# EAGLE board MiniPanel_V2 (EAGLE 8.7.1)
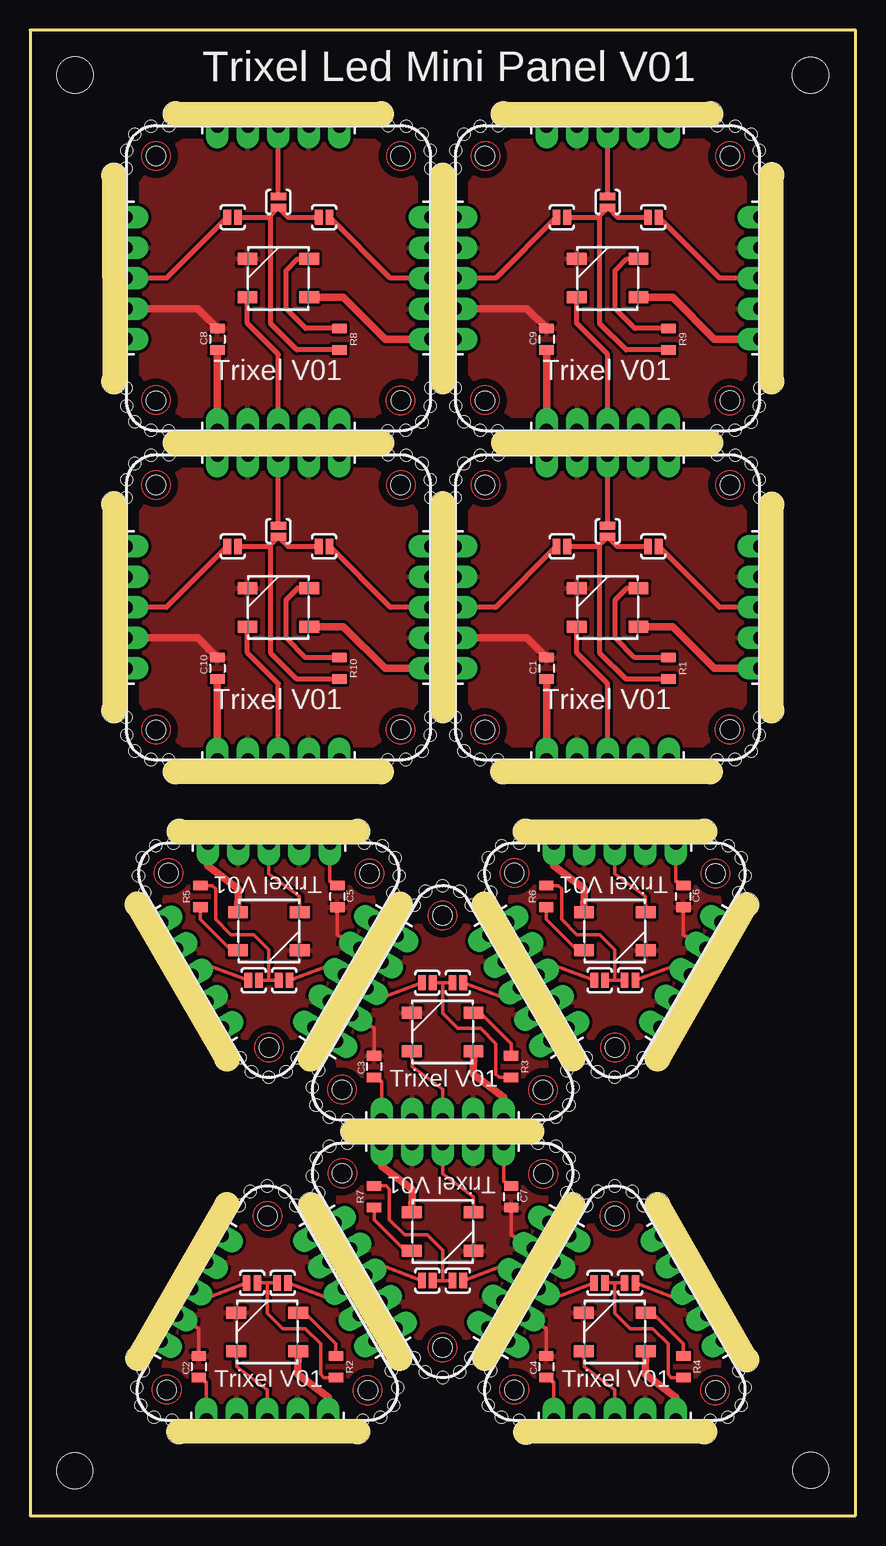
[diagram p0: board, top side]
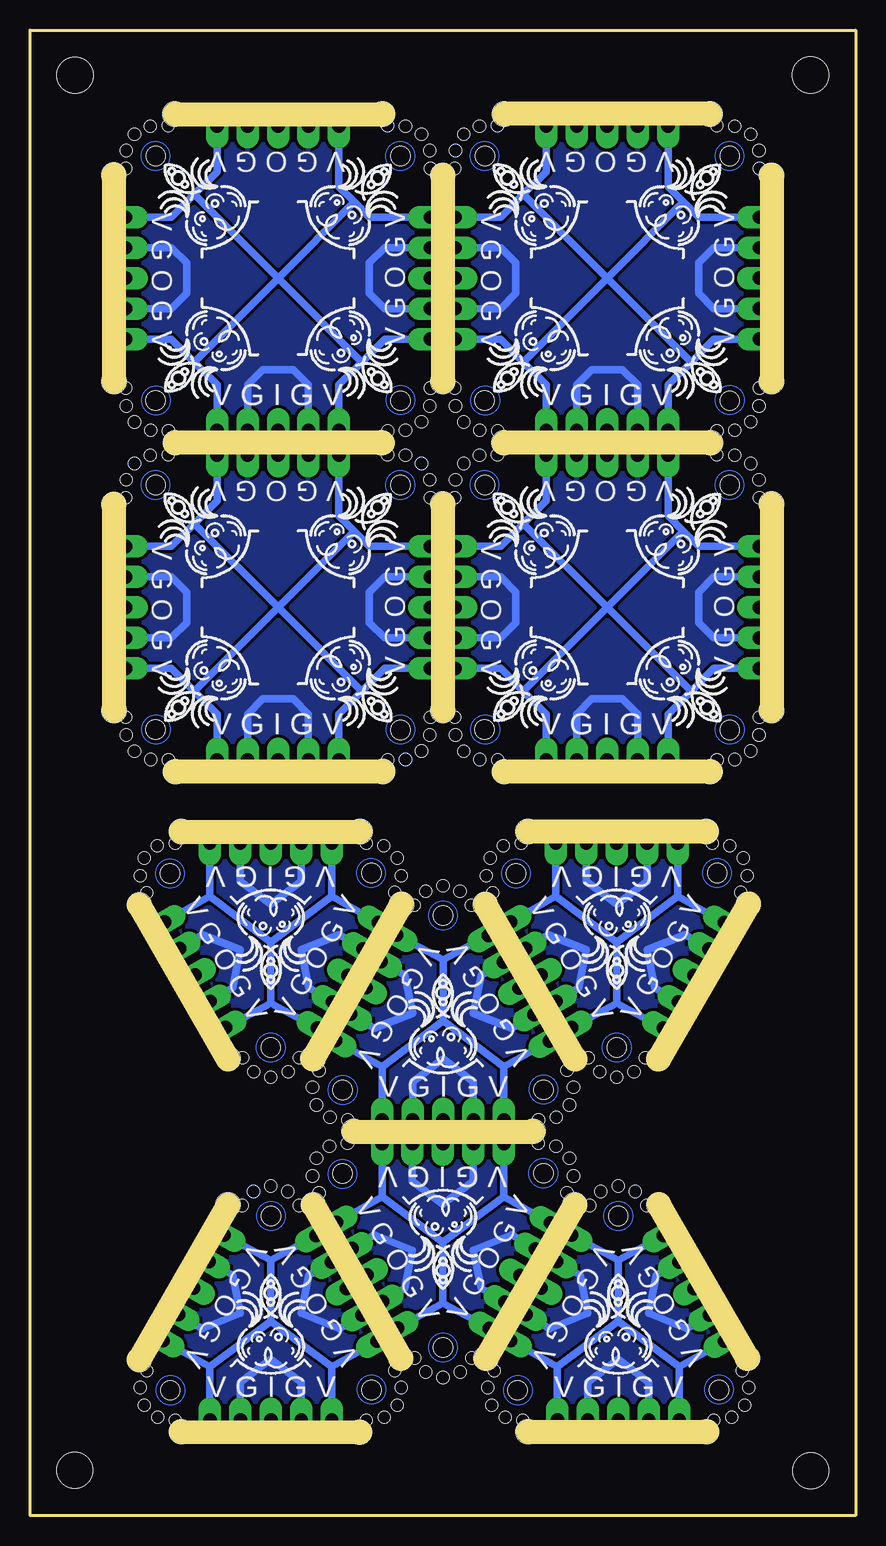
[diagram p1: board, bottom side, seen from below]

Size 68.8 x 123.8 mm. Coordinates in mm from the lower left corner, seen from the top.
Outline: 68.8,0 68.8,123.8 0,123.8 0,0 68.8,0
Copper layers (1*16): Top 0.035mm / dielectric 1.5mm / Bottom 0.035mm
Design rules "default": minimum track width 6mil, minimum drill 0.35mm, track to track 6mil, track to pad 6mil, pad to pad 6mil, via to via 6mil, smd to smd 6mil, copper to edge 40mil, drill to drill 6mil, minimum pad ring 10mil, minimum via ring 8mil, stop-mask expansion 4mil, vias tented up to drill 0mil, thermal gap 10mil
Holes 1.6 mm at 11.4,10.47 19.78,24.97 28.16,10.44 26,35.48 34.38,49.99 42.76,35.46 40.35,10.47 48.73,24.97 57.12,10.44 28.29,53.52 19.91,39.02 11.53,53.55 57.12,53.52 48.74,39.02 40.36,53.55 42.77,28.5 34.39,14 26,28.53 37.92,65.47 37.92,85.87 58.34,65.5 58.32,85.87 10.49,92.9 10.49,113.3 30.91,92.93 30.89,113.3 37.92,92.9 37.92,113.3 58.34,92.93 58.32,113.3 10.49,65.47 10.49,85.87 30.91,65.5 30.89,85.87
Holes 1 mm at 9.44,12.09 8.91,10.67 9.24,9.2 10.33,8.18 11.83,7.95 27.73,7.95 29.2,8.18 30.32,9.2 30.65,10.67 30.12,12.07 22.16,25.83 21.23,27 19.78,27.46 18.35,27 17.42,25.83 24.04,37.11 23.51,35.69 23.84,34.21 24.93,33.2 26.43,32.97 42.33,32.97 43.81,33.2 44.92,34.21 45.25,35.69 44.72,37.08 36.77,50.85 35.83,52.02 34.38,52.48 32.96,52.02 32.02,50.85 38.4,12.09 37.86,10.67 38.19,9.2 39.28,8.18 40.78,7.95 56.68,7.95 58.16,8.18 59.27,9.2 59.6,10.67 59.07,12.07 51.12,25.83 50.18,27 48.73,27.46 47.31,27 46.37,25.83 30.25,51.89 30.78,53.32 30.45,54.79 29.36,55.81 27.86,56.03 11.96,56.03 10.48,55.81 9.37,54.79 9.04,53.32 9.57,51.92 17.52,38.15 18.46,36.98 19.91,36.53 21.33,36.98 22.27,38.15 59.08,51.89 59.61,53.32 59.28,54.79 58.19,55.81 56.69,56.03 40.79,56.03 39.31,55.81 38.2,54.79 37.87,53.32 38.4,51.92 46.35,38.15 47.29,36.98 48.74,36.53 50.16,36.98 51.1,38.15 44.72,26.88 45.26,28.3 44.93,29.77 43.84,30.79 42.34,31.02 26.44,31.02 24.96,30.79 23.85,29.77 23.52,28.3 24.05,26.9 32,13.13 32.94,11.97 34.39,11.51 35.81,11.97 36.75,13.13 36.17,87.67 37.51,88.36 39.01,88.41 35.48,86.32 35.43,84.82 57.28,88.41 58.77,88.36 60.1,87.67 60.78,86.32 60.83,84.82 35.43,66.54 35.48,65.04 36.17,63.72 37.51,63.01 38.99,62.96 57.25,62.96 58.75,63.01 60.1,63.69 60.78,65.04 60.83,66.54 8.74,115.1 10.08,115.79 11.58,115.84 8.05,113.76 8,112.26 29.84,115.84 31.34,115.79 32.66,115.1 33.35,113.76 33.4,112.26 8,93.97 8.05,92.47 8.74,91.15 10.08,90.44 11.56,90.39 29.82,90.39 31.32,90.44 32.66,91.12 33.35,92.47 33.4,93.97 36.17,115.1 37.51,115.79 39.01,115.84 35.48,113.76 35.43,112.26 57.28,115.84 58.77,115.79 60.1,115.1 60.78,113.76 60.83,112.26 35.43,93.97 35.48,92.47 36.17,91.15 37.51,90.44 38.99,90.39 57.25,90.39 58.75,90.44 60.1,91.12 60.78,92.47 60.83,93.97 8.74,87.67 10.08,88.36 11.58,88.41 8.05,86.32 8,84.82 29.84,88.41 31.34,88.36 32.66,87.67 33.35,86.32 33.4,84.82 8,66.54 8.05,65.04 8.74,63.72 10.08,63.01 11.56,62.96 29.82,62.96 31.32,63.01 32.66,63.69 33.35,65.04 33.4,66.54
Holes 2 mm at 23.4,38.06 30.86,50.92 37.84,50.92 45.21,38.09 26.89,32.02 41.81,32.02 16.41,38.06 8.95,50.92 12.45,57.01 27.3,57.01 41.3,57 56.2,57 59.7,50.9 52.29,38.06 52.3,25.9 59.7,13 56.2,7 41.34,6.94 27.3,7 12.4,7 9,13.1 30.8,13.1 37.9,13.1 45.2,25.9 16.4,25.9 23.4,25.9 12.13,61.98 29.27,61.98 39.41,62 56.68,61.99 61.8,67.1 61.82,84.25 61.8,94.5 61.82,111.72 56.74,116.8 39.43,116.8 34.4,111.7 29.27,116.8 12.13,116.8 7,111.7 7,94.5 12.1,89.4 29.3,89.4 34.4,84.3 39.5,89.4 34.4,94.5 7,84.3 7,67.1 34.4,67.1 56.7,89.4
Holes 3 mm at 3.73,3.75 65.06,3.78 65.05,120.04 3.75,120.05
Milling: 25 lines

## Footprints (pad centres in the part's own frame; a part is rotated, then mirrored left to right if it is on the bottom)
0805 = smd 0.8 x 1.2: 1 -0.9,0; 2 0.9,0
WS2812B = smd 1.651 x 1: 1 -2.577,1.6; 2 -2.577,-1.6; 3 2.577,-1.6; 4 2.577,1.6
1X05_LONGPADS = drill 1.118 pad 1.88 long: 1 0,0; 2 2.54,0; 3 5.08,0; 4 7.62,0; 5 10.16,0
PAD-JUMPER-2-NO_YES_SILK = smd 0.635 x 1.27: 1 -0.45,0; 2 0.45,0

## Placement (x,y rotation side)
C1  0.1uF  [0805]  43.05,70.6 270 top
C2  0.1uF  [0805]  14.06,12.4 270 top
C3  0.1uF  [0805]  28.67,37.41 270 top
C4  0.1uF  [0805]  43.02,12.4 270 top
C5  0.1uF  [0805]  25.62,51.59 90 top
C6  0.1uF  [0805]  54.45,51.59 90 top
C7  0.1uF  [0805]  40.1,26.57 90 top
C8  0.1uF  [0805]  15.62,98.03 270 top
C9  0.1uF  [0805]  43.05,98.03 270 top
C10  0.1uF  [0805]  15.62,70.6 270 top
D1  [WS2812B]  48.13,75.68 180 top
D2  [WS2812B]  19.78,15.29 180 top
D3  [WS2812B]  34.38,40.31 180 top
D4  [WS2812B]  48.73,15.29 180 top
D5  [WS2812B]  19.91,48.69 0 top
D6  [WS2812B]  48.74,48.69 0 top
D7  [WS2812B]  34.39,23.68 0 top
D8  [WS2812B]  20.7,103.11 180 top
D9  [WS2812B]  48.13,103.11 180 top
D10  [WS2812B]  20.7,75.68 180 top
J1  [1X05_LONGPADS]  35.43,70.6 90 top
J2  [1X05_LONGPADS]  60.83,70.6 90 top
J3  [1X05_LONGPADS]  14.7,7.95 0 top
J4  [1X05_LONGPADS]  43.05,88.38 0 top
J5  [1X05_LONGPADS]  28.74,14.57 120 top
J6  [1X05_LONGPADS]  10.92,14.53 60 top
J7  [1X05_LONGPADS]  29.3,32.97 0 top
J8  [1X05_LONGPADS]  43.34,39.59 120 top
J9  [1X05_LONGPADS]  25.53,39.54 60 top
J10  [1X05_LONGPADS]  43.65,7.95 0 top
J11  [1X05_LONGPADS]  57.69,14.57 120 top
J12  [1X05_LONGPADS]  39.88,14.53 60 top
J13  [1X05_LONGPADS]  24.99,56.03 180 top
J14  [1X05_LONGPADS]  10.95,49.42 300 top
J15  [1X05_LONGPADS]  28.76,49.46 240 top
J16  [1X05_LONGPADS]  53.82,56.03 180 top
J17  [1X05_LONGPADS]  39.78,49.42 300 top
J18  [1X05_LONGPADS]  57.59,49.46 240 top
J19  [1X05_LONGPADS]  39.47,31.02 180 top
J20  [1X05_LONGPADS]  25.43,24.4 300 top
J21  [1X05_LONGPADS]  43.24,24.44 240 top
J22  [1X05_LONGPADS]  43.05,62.98 0 top
J23  [1X05_LONGPADS]  8,98.03 90 top
J24  [1X05_LONGPADS]  33.4,98.03 90 top
J25  [1X05_LONGPADS]  15.62,115.81 0 top
J26  [1X05_LONGPADS]  15.62,90.41 0 top
J27  [1X05_LONGPADS]  35.43,98.03 90 top
J28  [1X05_LONGPADS]  60.83,98.03 90 top
J29  [1X05_LONGPADS]  43.05,115.81 0 top
J30  [1X05_LONGPADS]  43.05,90.41 0 top
J31  [1X05_LONGPADS]  8,70.6 90 top
J32  [1X05_LONGPADS]  33.4,70.6 90 top
J33  [1X05_LONGPADS]  15.62,88.38 0 top
J34  [1X05_LONGPADS]  15.62,62.98 0 top
JP1  JUMPER-PAD-2-NOYES_SILK  [PAD-JUMPER-2-NO_YES_SILK]  51.94,80.76 0 top
JP2  JUMPER-PAD-2-NOYES_SILK  [PAD-JUMPER-2-NO_YES_SILK]  48.13,82.03 90 top
JP3  JUMPER-PAD-2-NOYES_SILK  [PAD-JUMPER-2-NO_YES_SILK]  18.51,19.38 180 top
JP4  JUMPER-PAD-2-NOYES_SILK  [PAD-JUMPER-2-NO_YES_SILK]  21.05,19.38 0 top
JP5  JUMPER-PAD-2-NOYES_SILK  [PAD-JUMPER-2-NO_YES_SILK]  33.11,44.4 180 top
JP6  JUMPER-PAD-2-NOYES_SILK  [PAD-JUMPER-2-NO_YES_SILK]  35.65,44.4 0 top
JP7  JUMPER-PAD-2-NOYES_SILK  [PAD-JUMPER-2-NO_YES_SILK]  47.46,19.38 180 top
JP8  JUMPER-PAD-2-NOYES_SILK  [PAD-JUMPER-2-NO_YES_SILK]  50,19.38 0 top
JP9  JUMPER-PAD-2-NOYES_SILK  [PAD-JUMPER-2-NO_YES_SILK]  21.18,44.6 0 top
JP10  JUMPER-PAD-2-NOYES_SILK  [PAD-JUMPER-2-NO_YES_SILK]  18.64,44.6 180 top
JP11  JUMPER-PAD-2-NOYES_SILK  [PAD-JUMPER-2-NO_YES_SILK]  50.01,44.6 0 top
JP12  JUMPER-PAD-2-NOYES_SILK  [PAD-JUMPER-2-NO_YES_SILK]  47.47,44.6 180 top
JP13  JUMPER-PAD-2-NOYES_SILK  [PAD-JUMPER-2-NO_YES_SILK]  35.66,19.59 0 top
JP14  JUMPER-PAD-2-NOYES_SILK  [PAD-JUMPER-2-NO_YES_SILK]  33.12,19.59 180 top
JP15  JUMPER-PAD-2-NOYES_SILK  [PAD-JUMPER-2-NO_YES_SILK]  44.32,80.76 180 top
JP16  JUMPER-PAD-2-NOYES_SILK  [PAD-JUMPER-2-NO_YES_SILK]  24.51,108.19 0 top
JP17  JUMPER-PAD-2-NOYES_SILK  [PAD-JUMPER-2-NO_YES_SILK]  20.7,109.46 90 top
JP18  JUMPER-PAD-2-NOYES_SILK  [PAD-JUMPER-2-NO_YES_SILK]  16.89,108.19 180 top
JP19  JUMPER-PAD-2-NOYES_SILK  [PAD-JUMPER-2-NO_YES_SILK]  51.94,108.19 0 top
JP20  JUMPER-PAD-2-NOYES_SILK  [PAD-JUMPER-2-NO_YES_SILK]  48.13,109.46 90 top
JP21  JUMPER-PAD-2-NOYES_SILK  [PAD-JUMPER-2-NO_YES_SILK]  44.32,108.19 180 top
JP22  JUMPER-PAD-2-NOYES_SILK  [PAD-JUMPER-2-NO_YES_SILK]  24.51,80.76 0 top
JP23  JUMPER-PAD-2-NOYES_SILK  [PAD-JUMPER-2-NO_YES_SILK]  20.7,82.03 90 top
JP24  JUMPER-PAD-2-NOYES_SILK  [PAD-JUMPER-2-NO_YES_SILK]  16.89,80.76 180 top
R1  [0805]  53.21,70.6 270 top
R2  1k  [0805]  25.49,12.4 270 top
R3  1k  [0805]  40.1,37.41 270 top
R4  1k  [0805]  54.45,12.4 270 top
R5  1k  [0805]  14.19,51.59 90 top
R6  1k  [0805]  43.02,51.59 90 top
R7  1k  [0805]  28.67,26.57 90 top
R8  [0805]  25.78,98.03 270 top
R9  [0805]  53.21,98.03 270 top
R10  [0805]  25.78,70.6 270 top

## Library data of the parts
C1-C10 = SparkFun-Capacitors
D1-D10 = SparkFun-LED; PROD_ID: DIO-12503
J1-J34 = SparkFun-Connectors
JP1-JP24 = SparkFun-Passives
R1-R10 = SparkFun-Resistors

## Nets
DIN: D1.4 J22.3
DIN1: D2.4 J3.3
DIN2: D3.4 J7.3
DIN3: D4.4 J10.3
DIN4: D5.4 J13.3
DIN5: D6.4 J16.3
DIN6: D7.4 J19.3
DIN7: D8.4 J26.3
DIN8: D9.4 J30.3
DIN9: D10.4 J34.3
DOUT: JP1.1 JP2.1 JP15.1 R1.2
DOUT1: JP3.1 JP4.1 R2.2
DOUT2: JP5.1 JP6.1 R3.2
DOUT3: JP7.1 JP8.1 R4.2
DOUT4: JP9.1 JP10.1 R5.2
DOUT5: JP11.1 JP12.1 R6.2
DOUT6: JP13.1 JP14.1 R7.2
DOUT7: JP16.1 JP17.1 JP18.1 R8.2
DOUT8: JP19.1 JP20.1 JP21.1 R9.2
DOUT9: JP22.1 JP23.1 JP24.1 R10.2
GND: C1.1 D1.3 J1.2 J1.4 J2.2 J2.4 J4.2 J4.4 J22.2 J22.4
GND1: C2.1 D2.3 J3.2 J3.4 J5.2 J5.4 J6.2 J6.4
GND2: C3.1 D3.3 J7.2 J7.4 J8.2 J8.4 J9.2 J9.4
GND3: C4.1 D4.3 J10.2 J10.4 J11.2 J11.4 J12.2 J12.4
GND4: C5.1 D5.3 J13.2 J13.4 J14.2 J14.4 J15.2 J15.4
GND5: C6.1 D6.3 J16.2 J16.4 J17.2 J17.4 J18.2 J18.4
GND6: C7.1 D7.3 J19.2 J19.4 J20.2 J20.4 J21.2 J21.4
GND7: C8.1 D8.3 J23.2 J23.4 J24.2 J24.4 J25.2 J25.4 J26.2 J26.4
GND8: C9.1 D9.3 J27.2 J27.4 J28.2 J28.4 J29.2 J29.4 J30.2 J30.4
GND9: C10.1 D10.3 J31.2 J31.4 J32.2 J32.4 J33.2 J33.4 J34.2 J34.4
N$1: J4.3 JP2.2
N$2: J2.3 JP1.2
N$3: J1.3 JP15.2
N$4: J5.3 JP4.2
N$5: D2.2 R2.1
N$6: J6.3 JP3.2
N$7: J8.3 JP6.2
N$8: D3.2 R3.1
N$9: J9.3 JP5.2
N$10: J11.3 JP8.2
N$11: D4.2 R4.1
N$12: J12.3 JP7.2
N$13: J14.3 JP10.2
N$14: D5.2 R5.1
N$15: J15.3 JP9.2
N$16: J17.3 JP12.2
N$17: D6.2 R6.1
N$18: J18.3 JP11.2
N$19: J20.3 JP14.2
N$20: D7.2 R7.1
N$21: J21.3 JP13.2
N$22: D1.2 R1.1
N$23: J25.3 JP17.2
N$24: J24.3 JP16.2
N$25: J23.3 JP18.2
N$26: D8.2 R8.1
N$27: J29.3 JP20.2
N$28: J28.3 JP19.2
N$29: J27.3 JP21.2
N$30: D9.2 R9.1
N$31: J33.3 JP23.2
N$32: J32.3 JP22.2
N$33: J31.3 JP24.2
N$34: D10.2 R10.1
VIN: C1.2 D1.1 J1.1 J1.5 J2.1 J2.5 J4.1 J4.5 J22.1 J22.5
VIN1: C2.2 D2.1 J3.1 J3.5 J5.1 J5.5 J6.1 J6.5
VIN2: C3.2 D3.1 J7.1 J7.5 J8.1 J8.5 J9.1 J9.5
VIN3: C4.2 D4.1 J10.1 J10.5 J11.1 J11.5 J12.1 J12.5
VIN4: C5.2 D5.1 J13.1 J13.5 J14.1 J14.5 J15.1 J15.5
VIN5: C6.2 D6.1 J16.1 J16.5 J17.1 J17.5 J18.1 J18.5
VIN6: C7.2 D7.1 J19.1 J19.5 J20.1 J20.5 J21.1 J21.5
VIN7: C8.2 D8.1 J23.1 J23.5 J24.1 J24.5 J25.1 J25.5 J26.1 J26.5
VIN8: C9.2 D9.1 J27.1 J27.5 J28.1 J28.5 J29.1 J29.5 J30.1 J30.5
VIN9: C10.2 D10.1 J31.1 J31.5 J32.1 J32.5 J33.1 J33.5 J34.1 J34.5

## Tracks (layer width: path | path; a pad name or v marks a point on that pad's centre or on a via)
DIN
  Top 0.406: J22.3 48.13,69.33 45.55,71.91 D1.4
DIN1
  Top 0.305: J3.3 19.78,10.49 17.24,12.4 D2.4
DIN2
  Top 0.305: J7.3 34.38,35.51 31.84,37.41 D3.4
DIN3
  Top 0.305: J10.3 48.73,10.49 46.19,12.4 D4.4
DIN4
  Top 0.305: J13.3 19.91,53.49 22.45,51.59 D5.4
DIN5
  Top 0.305: J16.3 48.74,53.49 51.28,51.59 D6.4
DIN6
  Top 0.305: J19.3 34.39,28.48 36.93,26.57 D7.4
DIN7
  Top 0.406: J26.3 20.7,96.76 18.12,99.34 D8.4
DIN8
  Top 0.406: J30.3 48.13,96.76 45.55,99.34 D9.4
DIN9
  Top 0.406: J34.3 20.7,69.33 18.12,71.91 D10.4
DOUT
  Top 0.406: JP2.1 47.31,80.76 JP15.1 | JP2.1 48.95,80.76 JP1.1 | R1.2 49.67,69.7 47.5,71.87 47.5,80.95 JP2.1
DOUT1
  Top 0.305: R2.2 24.49,11.5 24.22,11.76 24.22,14.3 22.95,15.57 21.05,15.57 19.78,16.84 19.78,19.38 | 19.78,19.38 JP4.1 | 19.78,19.38 JP3.1
DOUT2
  Top 0.305: R3.2 39.09,36.51 38.83,36.78 38.83,39.32 37.56,40.59 35.65,40.59 34.38,41.86 34.38,44.4 | 34.38,44.4 JP6.1 | 34.38,44.4 JP5.1
DOUT3
  Top 0.305: R4.2 53.44,11.5 53.18,11.76 53.18,14.3 51.91,15.57 50,15.57 48.73,16.84 48.73,19.38 | 48.73,19.38 JP8.1 | 48.73,19.38 JP7.1
DOUT4
  Top 0.305: R5.2 15.2,52.49 15.46,52.22 15.46,49.68 16.73,48.41 18.64,48.41 19.91,47.14 19.91,44.6 | 19.91,44.6 JP10.1 | 19.91,44.6 JP9.1
DOUT5
  Top 0.305: R6.2 44.03,52.49 44.29,52.22 44.29,49.68 45.56,48.41 47.47,48.41 48.74,47.14 48.74,44.6 | 48.74,44.6 JP12.1 | 48.74,44.6 JP11.1
DOUT6
  Top 0.305: R7.2 29.68,27.47 29.94,27.21 29.94,24.67 31.21,23.4 33.12,23.4 34.39,22.13 34.39,19.59 | 34.39,19.59 JP14.1 | 34.39,19.59 JP13.1
DOUT7
  Top 0.406: JP17.1 19.88,108.19 JP18.1 | JP17.1 21.52,108.19 JP16.1 | R8.2 22.23,97.13 20.06,99.3 20.06,108.38 JP17.1
DOUT8
  Top 0.406: JP20.1 47.31,108.19 JP21.1 | JP20.1 48.95,108.19 JP19.1 | R9.2 49.67,97.13 47.5,99.3 47.5,108.38 JP20.1
DOUT9
  Top 0.406: JP23.1 19.88,80.76 JP24.1 | JP23.1 21.52,80.76 JP22.1 | R10.2 22.23,69.7 20.06,71.87 20.06,80.95 JP23.1
GND
  Top 0.61: C1.1 41.41,73.14 J1.2
  Bottom 0.61: J1.2 39.24,73.14 40.51,74.41 40.51,76.95 39.24,78.22 J1.4 | J2.2 57.02,73.14 55.75,74.41 55.75,76.95 57.02,78.22 J2.4 | J22.4 50.67,66.79 49.4,68.06 46.86,68.06 45.59,66.79 J22.2
  pour Top (isolate 0.254): 39.24,64.25 57.02,64.25 59.56,66.79 59.56,84.57 57.02,87.11 39.24,87.11 36.7,84.57 36.7,66.79
  pour Bottom (isolate 0.254): 36.7,84.57 36.7,66.79 39.24,64.25 57.02,64.25 59.56,66.79 59.56,84.57 57.02,87.11 39.24,87.11
GND1
  Top 0.305: C2.1 14.06,15.57 J6.2
  Bottom 0.61: J3.2 17.24,11.13 19.78,13.03 22.32,11.13 J3.4 | J6.2 14.06,15.57 17.24,16.84 16.6,20.02 J6.4 | J5.2 25.49,15.57 22.32,16.84 22.95,20.02 J5.4
  pour Bottom (isolate 0.254): 11.52,8.9 28.03,8.9 29.3,11.44 21.36,25.1 18.19,25.1 10.25,11.76
  pour Top (isolate 0.254): 11.52,8.9 28.03,8.9 29.3,11.44 21.36,25.1 18.19,25.1 10.25,11.76
GND2
  Top 0.305: C3.1 28.67,40.59 J9.2
  Bottom 0.61: J7.2 31.84,36.14 34.38,38.05 36.92,36.14 J7.4 | J9.2 28.67,40.59 31.84,41.86 31.21,45.03 J9.4 | J8.2 40.1,40.59 36.92,41.86 37.56,45.03 J8.4
  pour Bottom (isolate 0.254): 26.13,33.92 42.64,33.92 43.91,36.46 35.97,50.11 32.79,50.11 24.86,36.78
  pour Top (isolate 0.254): 26.13,33.92 42.64,33.92 43.91,36.46 35.97,50.11 32.79,50.11 24.86,36.78
GND3
  Top 0.305: C4.1 43.02,15.57 J12.2
  Bottom 0.61: J10.2 46.19,11.13 48.73,13.03 51.27,11.13 J10.4 | J12.2 43.02,15.57 46.19,16.84 45.56,20.02 J12.4 | J11.2 54.45,15.57 51.27,16.84 51.91,20.02 J11.4
  pour Bottom (isolate 0.254): 40.48,8.9 56.99,8.9 58.26,11.44 50.32,25.1 47.15,25.1 39.21,11.76
  pour Top (isolate 0.254): 40.48,8.9 56.99,8.9 58.26,11.44 50.32,25.1 47.15,25.1 39.21,11.76
GND4
  Top 0.305: C5.1 25.62,48.41 J15.2
  Bottom 0.61: J13.2 22.45,52.86 19.91,50.95 17.37,52.86 J13.4 | J15.2 25.62,48.41 22.45,47.14 23.08,43.97 J15.4 | J14.2 14.19,48.41 17.37,47.14 16.73,43.97 J14.4
  pour Bottom (isolate 0.254): 28.16,55.08 11.65,55.08 10.38,52.54 18.32,38.89 21.5,38.89 29.43,52.22
  pour Top (isolate 0.254): 28.16,55.08 11.65,55.08 10.38,52.54 18.32,38.89 21.5,38.89 29.43,52.22
GND5
  Top 0.305: C6.1 54.45,48.41 J18.2
  Bottom 0.61: J16.2 51.28,52.86 48.74,50.95 46.2,52.86 J16.4 | J18.2 54.45,48.41 51.28,47.14 51.91,43.97 J18.4 | J17.2 43.02,48.41 46.2,47.14 45.56,43.97 J17.4
  pour Bottom (isolate 0.254): 56.99,55.08 40.48,55.08 39.21,52.54 47.15,38.89 50.32,38.89 58.26,52.22
  pour Top (isolate 0.254): 56.99,55.08 40.48,55.08 39.21,52.54 47.15,38.89 50.32,38.89 58.26,52.22
GND6
  Top 0.305: C7.1 40.1,23.4 J21.2
  Bottom 0.61: J19.2 36.93,27.84 34.39,25.94 31.85,27.84 J19.4 | J21.2 40.1,23.4 36.93,22.13 37.56,18.95 J21.4 | J20.2 28.67,23.4 31.85,22.13 31.21,18.95 J20.4
  pour Bottom (isolate 0.254): 42.64,30.06 26.13,30.06 24.86,27.52 32.8,13.87 35.97,13.87 43.91,27.21
  pour Top (isolate 0.254): 42.64,30.06 26.13,30.06 24.86,27.52 32.8,13.87 35.97,13.87 43.91,27.21
GND7
  Top 0.61: C8.1 13.98,100.57 J23.2
  Bottom 0.61: J23.2 11.81,100.57 13.08,101.84 13.08,104.38 11.81,105.65 J23.4 | J24.2 29.59,100.57 28.32,101.84 28.32,104.38 29.59,105.65 J24.4 | J26.4 23.24,94.22 21.97,95.49 19.43,95.49 18.16,94.22 J26.2
  pour Top (isolate 0.254): 11.81,91.68 29.59,91.68 32.13,94.22 32.13,112 29.59,114.54 11.81,114.54 9.27,112 9.27,94.22
  pour Bottom (isolate 0.254): 9.27,112 9.27,94.22 11.81,91.68 29.59,91.68 32.13,94.22 32.13,112 29.59,114.54 11.81,114.54
GND8
  Top 0.61: C9.1 41.41,100.57 J27.2
  Bottom 0.61: J27.2 39.24,100.57 40.51,101.84 40.51,104.38 39.24,105.65 J27.4 | J28.2 57.02,100.57 55.75,101.84 55.75,104.38 57.02,105.65 J28.4 | J30.4 50.67,94.22 49.4,95.49 46.86,95.49 45.59,94.22 J30.2
  pour Top (isolate 0.254): 39.24,91.68 57.02,91.68 59.56,94.22 59.56,112 57.02,114.54 39.24,114.54 36.7,112 36.7,94.22
  pour Bottom (isolate 0.254): 36.7,112 36.7,94.22 39.24,91.68 57.02,91.68 59.56,94.22 59.56,112 57.02,114.54 39.24,114.54
GND9
  Top 0.61: C10.1 13.98,73.14 J31.2
  Bottom 0.61: J31.2 11.81,73.14 13.08,74.41 13.08,76.95 11.81,78.22 J31.4 | J32.2 29.59,73.14 28.32,74.41 28.32,76.95 29.59,78.22 J32.4 | J34.4 23.24,66.79 21.97,68.06 19.43,68.06 18.16,66.79 J34.2
  pour Top (isolate 0.254): 11.81,64.25 29.59,64.25 32.13,66.79 32.13,84.57 29.59,87.11 11.81,87.11 9.27,84.57 9.27,66.79
  pour Bottom (isolate 0.254): 9.27,84.57 9.27,66.79 11.81,64.25 29.59,64.25 32.13,66.79 32.13,84.57 29.59,87.11 11.81,87.11
N$1
  Top 0.406: JP2.2 J4.3
N$2
  Top 0.406: J2.3 57.47,75.68 JP1.2
N$3
  Top 0.406: JP15.2 38.79,75.68 J1.3
N$4
  Top 0.305: JP4.2 24.86,18.11 J5.3
N$5
  Top 0.305: R2.1 25.49,14.3 22.95,16.84 D2.2
N$6
  Top 0.305: J6.3 14.7,18.11 JP3.2
N$7
  Top 0.305: JP6.2 39.46,43.13 J8.3
N$8
  Top 0.305: R3.1 40.1,39.32 37.56,41.86 D3.2
N$9
  Top 0.305: J9.3 29.3,43.13 JP5.2
N$10
  Top 0.305: JP8.2 53.81,18.11 J11.3
N$11
  Top 0.305: R4.1 54.45,14.3 51.91,16.84 D4.2
N$12
  Top 0.305: J12.3 43.65,18.11 JP7.2
N$13
  Top 0.305: JP10.2 14.83,45.87 J14.3
N$14
  Top 0.305: R5.1 14.19,49.68 16.73,47.14 D5.2
N$15
  Top 0.305: J15.3 24.99,45.87 JP9.2
N$16
  Top 0.305: JP12.2 43.66,45.87 J17.3
N$17
  Top 0.305: R6.1 43.02,49.68 45.56,47.14 D6.2
N$18
  Top 0.305: J18.3 53.82,45.87 JP11.2
N$19
  Top 0.305: JP14.2 29.31,20.86 J20.3
N$20
  Top 0.305: R7.1 28.67,24.67 31.21,22.13 D7.2
N$21
  Top 0.305: J21.3 39.47,20.86 JP13.2
N$22
  Top 0.406: R1.1 50.41,71.5 48.77,73.14 48.77,76.32 49.73,77.28 D1.2
N$23
  Top 0.406: JP17.2 J25.3
N$24
  Top 0.406: J24.3 30.04,103.11 JP16.2
N$25
  Top 0.406: JP18.2 11.36,103.11 J23.3
N$26
  Top 0.406: R8.1 22.98,98.93 21.34,100.57 21.34,103.75 22.3,104.71 D8.2
N$27
  Top 0.406: JP20.2 J29.3
N$28
  Top 0.406: J28.3 57.47,103.11 JP19.2
N$29
  Top 0.406: JP21.2 38.79,103.11 J27.3
N$30
  Top 0.406: R9.1 50.41,98.93 48.77,100.57 48.77,103.75 49.73,104.71 D9.2
N$31
  Top 0.406: JP23.2 J33.3
N$32
  Top 0.406: J32.3 30.04,75.68 JP22.2
N$33
  Top 0.406: JP24.2 11.36,75.68 J31.3
N$34
  Top 0.406: R10.1 22.98,71.5 21.34,73.14 21.34,76.32 22.3,77.28 D10.2
VIN
  Top 0.61: J22.1 C1.2 | D1.1 53.54,74.08 57.02,70.6 J2.1
  Bottom 0.61: J22.1 43.05,66.79 41.15,68.7 | 41.15,68.7 39.24,70.6 J1.1 | J22.5 53.21,66.79 55.12,68.7 | 55.12,68.7 57.02,70.6 J2.1 | J2.5 57.02,80.76 55.12,82.67 | 55.12,82.67 53.21,84.57 J4.5 | J4.1 43.05,83.3 41.78,82.03 | 41.78,82.03 40.51,80.76 J1.5 | 55.12,68.7 48.13,75.68 | 48.13,75.68 41.78,82.03 | 55.12,82.67 48.13,75.68 | 48.13,75.68 41.15,68.7
VIN1
  Top 0.305: C2.2 14.7,11.13 J3.1
  Top 0.61: J3.5 24.86,9.86 22.32,11.76 D2.1
  Bottom 0.61: J3.5 24.86,12.4 | 24.86,12.4 J5.1 | J3.1 14.7,12.4 | J6.5 19.78,21.29 | 19.78,21.29 J5.5 | 14.7,12.4 19.78,16.21 | 19.78,16.21 19.78,21.29 | 19.78,16.21 24.86,12.4 | 14.7,12.4 J6.1
VIN2
  Top 0.305: C3.2 29.3,36.14 J7.1
  Top 0.61: J7.5 39.46,34.87 36.92,36.78 D3.1
  Bottom 0.61: J7.5 39.46,37.41 | 39.46,37.41 J8.1 | J7.1 29.3,37.41 | J9.5 34.38,46.3 | 34.38,46.3 J8.5 | 29.3,37.41 34.38,41.22 | 34.38,41.22 34.38,46.3 | 34.38,41.22 39.46,37.41 | 29.3,37.41 J9.1
VIN3
  Top 0.305: C4.2 43.65,11.13 J10.1
  Top 0.61: J10.5 53.81,9.86 51.27,11.76 D4.1
  Bottom 0.61: J10.5 53.81,12.4 | 53.81,12.4 J11.1 | J10.1 43.65,12.4 | J12.5 48.73,21.29 | 48.73,21.29 J11.5 | 43.65,12.4 48.73,16.21 | 48.73,16.21 48.73,21.29 | 48.73,16.21 53.81,12.4 | 43.65,12.4 J12.1
VIN4
  Top 0.305: C5.2 24.99,52.86 J13.1
  Top 0.61: J13.5 14.83,54.13 17.37,52.22 D5.1
  Bottom 0.61: J13.5 14.83,51.59 | 14.83,51.59 J14.1 | J13.1 24.99,51.59 | J15.5 19.91,42.7 | 19.91,42.7 J14.5 | 24.99,51.59 19.91,47.78 | 19.91,47.78 19.91,42.7 | 19.91,47.78 14.83,51.59 | 24.99,51.59 J15.1
VIN5
  Top 0.305: C6.2 53.82,52.86 J16.1
  Top 0.61: J16.5 43.66,54.13 46.2,52.22 D6.1
  Bottom 0.61: J16.5 43.66,51.59 | 43.66,51.59 J17.1 | J16.1 53.82,51.59 | J18.5 48.74,42.7 | 48.74,42.7 J17.5 | 53.82,51.59 48.74,47.78 | 48.74,47.78 48.74,42.7 | 48.74,47.78 43.66,51.59 | 53.82,51.59 J18.1
VIN6
  Top 0.305: C7.2 39.47,27.84 J19.1
  Top 0.61: J19.5 29.31,29.11 31.85,27.21 D7.1
  Bottom 0.61: J19.5 29.31,26.57 | 29.31,26.57 J20.1 | J19.1 39.47,26.57 | J21.5 34.39,17.68 | 34.39,17.68 J20.5 | 39.47,26.57 34.39,22.76 | 34.39,22.76 34.39,17.68 | 34.39,22.76 29.31,26.57 | 39.47,26.57 J21.1
VIN7
  Top 0.61: J26.1 C8.2 | D8.1 26.11,101.51 29.59,98.03 J24.1
  Bottom 0.61: J26.1 15.62,94.22 13.71,96.13 | 13.71,96.13 11.81,98.03 J23.1 | J26.5 25.78,94.22 27.68,96.13 | 27.68,96.13 29.59,98.03 J24.1 | J24.5 29.59,108.19 27.68,110.1 | 27.68,110.1 25.78,112 J25.5 | J25.1 15.62,110.73 14.35,109.46 | 14.35,109.46 13.08,108.19 J23.5 | 27.68,96.13 20.7,103.11 | 20.7,103.11 14.35,109.46 | 27.68,110.1 20.7,103.11 | 20.7,103.11 13.71,96.13
VIN8
  Top 0.61: J30.1 C9.2 | D9.1 53.54,101.51 57.02,98.03 J28.1
  Bottom 0.61: J30.1 43.05,94.22 41.15,96.13 | 41.15,96.13 39.24,98.03 J27.1 | J30.5 53.21,94.22 55.12,96.13 | 55.12,96.13 57.02,98.03 J28.1 | J28.5 57.02,108.19 55.12,110.1 | 55.12,110.1 53.21,112 J29.5 | J29.1 43.05,110.73 41.78,109.46 | 41.78,109.46 40.51,108.19 J27.5 | 55.12,96.13 48.13,103.11 | 48.13,103.11 41.78,109.46 | 55.12,110.1 48.13,103.11 | 48.13,103.11 41.15,96.13
VIN9
  Top 0.61: J34.1 C10.2 | D10.1 26.11,74.08 29.59,70.6 J32.1
  Bottom 0.61: J34.1 15.62,66.79 13.71,68.7 | 13.71,68.7 11.81,70.6 J31.1 | J34.5 25.78,66.79 27.68,68.7 | 27.68,68.7 29.59,70.6 J32.1 | J32.5 29.59,80.76 27.68,82.67 | 27.68,82.67 25.78,84.57 J33.5 | J33.1 15.62,83.3 14.35,82.03 | 14.35,82.03 13.08,80.76 J31.5 | 27.68,68.7 20.7,75.68 | 20.7,75.68 14.35,82.03 | 27.68,82.67 20.7,75.68 | 20.7,75.68 13.71,68.7
(copper drawn outside any net)
  shapes: Bottom circle x34, Top circle x34

## Text on the board
tPlace: Trixel Led Mini Panel V01 | Trixel V01 | Trixel V01 | Trixel V01 | Trixel V01 | Trixel V01 | Trixel V01 | Trixel V01 | Trixel V01 | Trixel V01 | Trixel V01
bPlace: V G O G V | V G O G V | V G O G V | V G O G V | V G O G V | V G O G V | V G I G V | V G I G V | V G O G V | V G O G V | V G O G V | V G O G V | V G O G V | V G O G V | V G I G V | V G I G V | V G I G V | V G I G V | V G O G V | V G O G V | V G O G V | V G O G V | V G O G V | V G O G V | V G I G V | V G I G V | V G O G V | V G O G V | V G O G V | V G O G V | V G O G V | V G O G V | V G I G V | V G I G V